# Altium PCB PCB2.PcbDoc
Units mm, origin at the board's own origin, x right, y up, seen from the top; angles counter-clockwise.
Board outline 70.6 x 47 mm, 2 copper layers (Top Layer, Bottom Layer); 29 components, 22 nets, 107 pads, 16 vias.
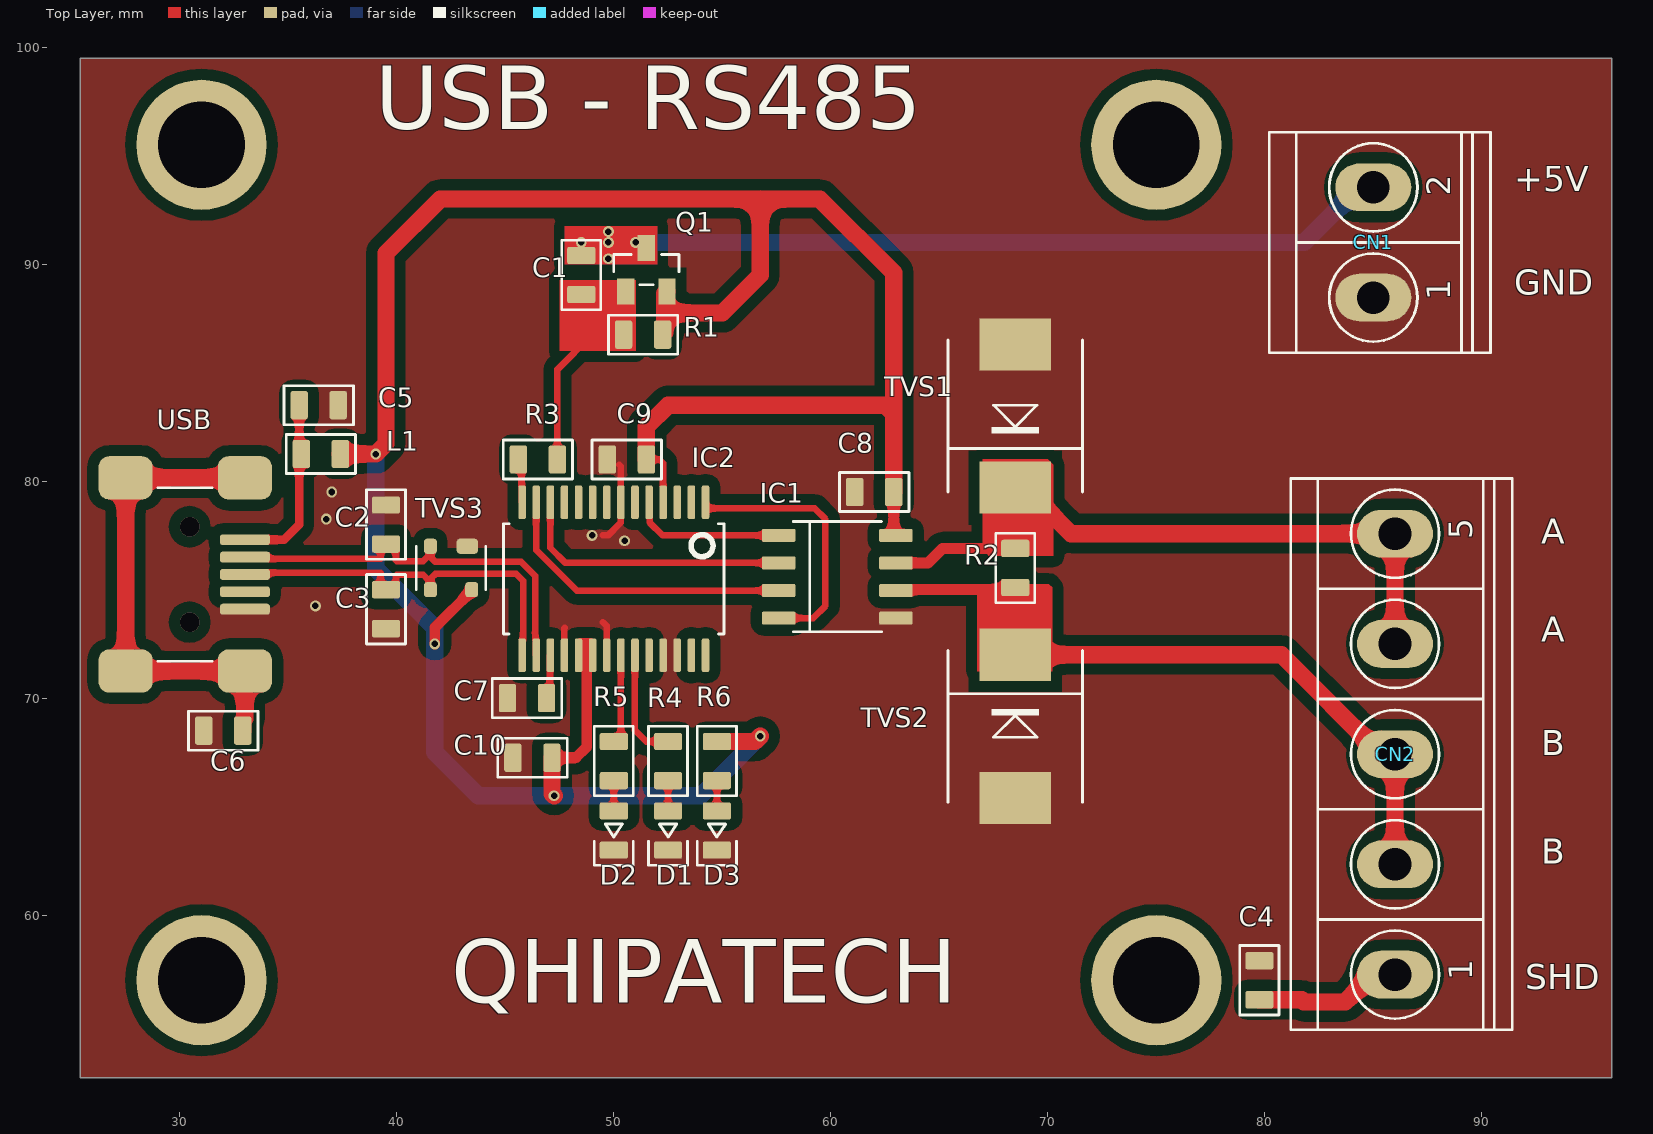
[diagram p0: Top Layer view]
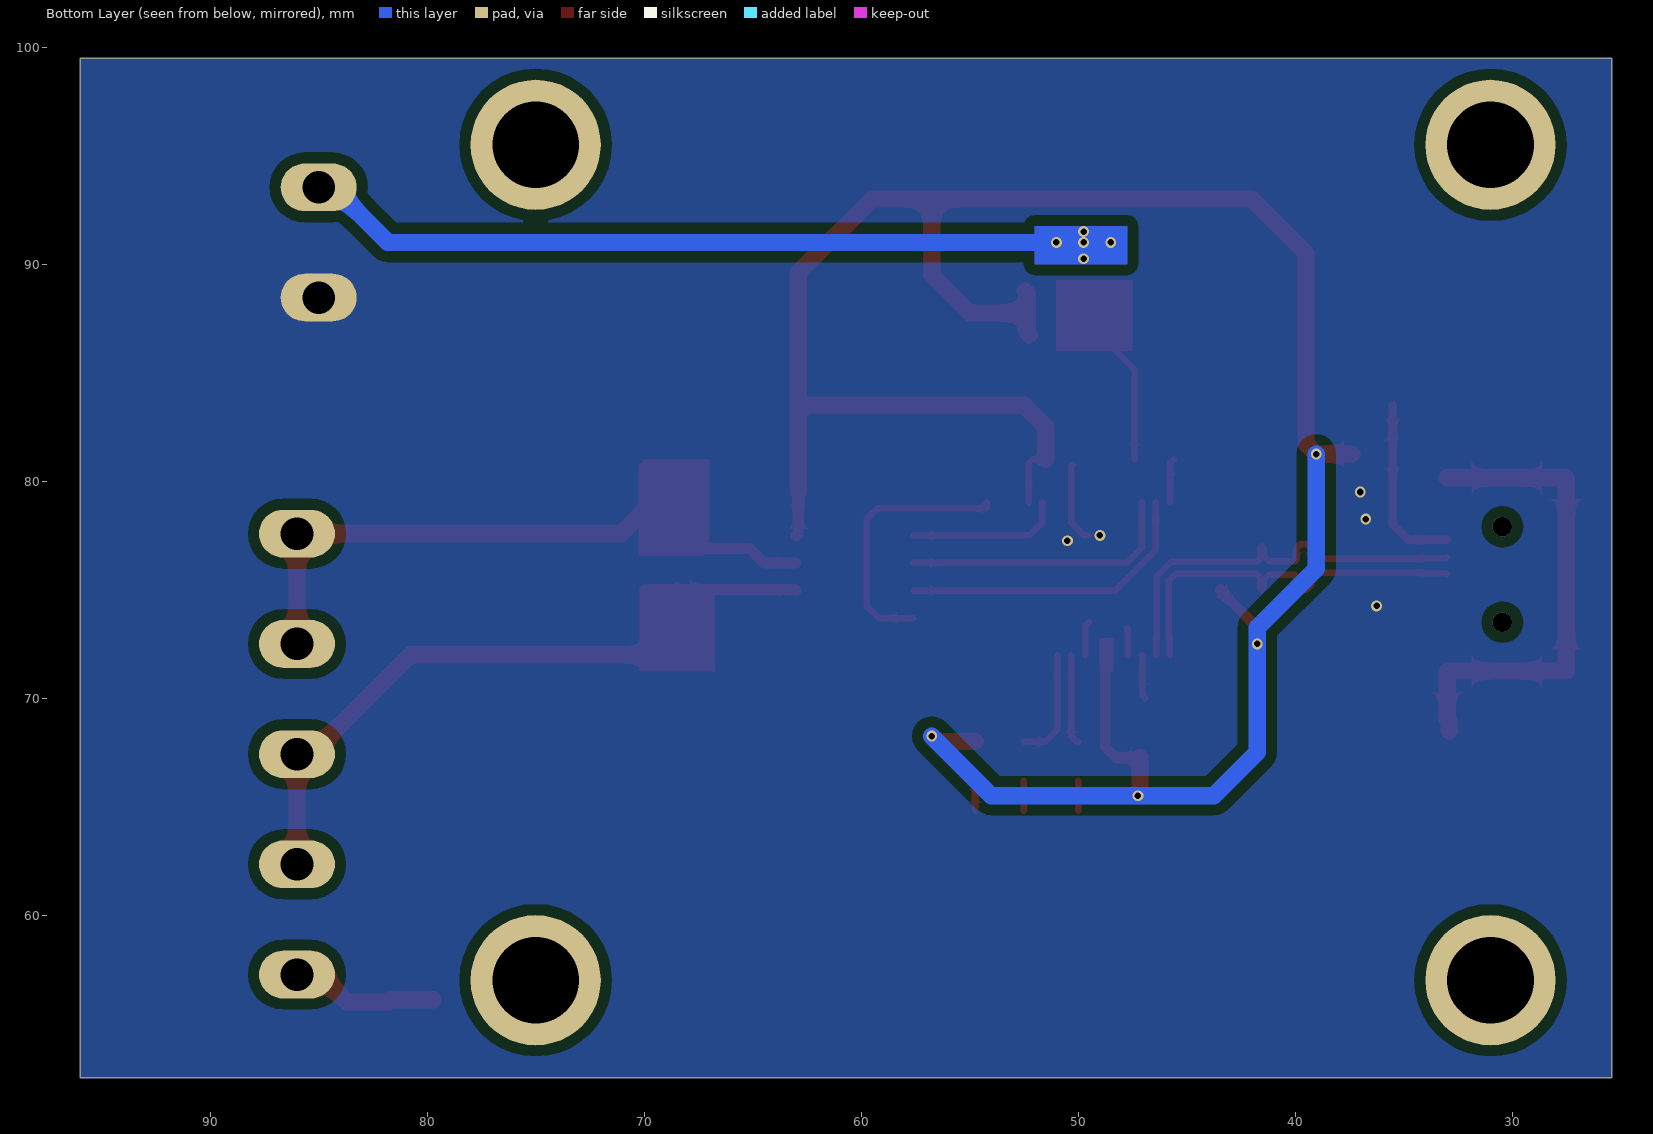
[diagram p1: Bottom Layer view, seen from below]
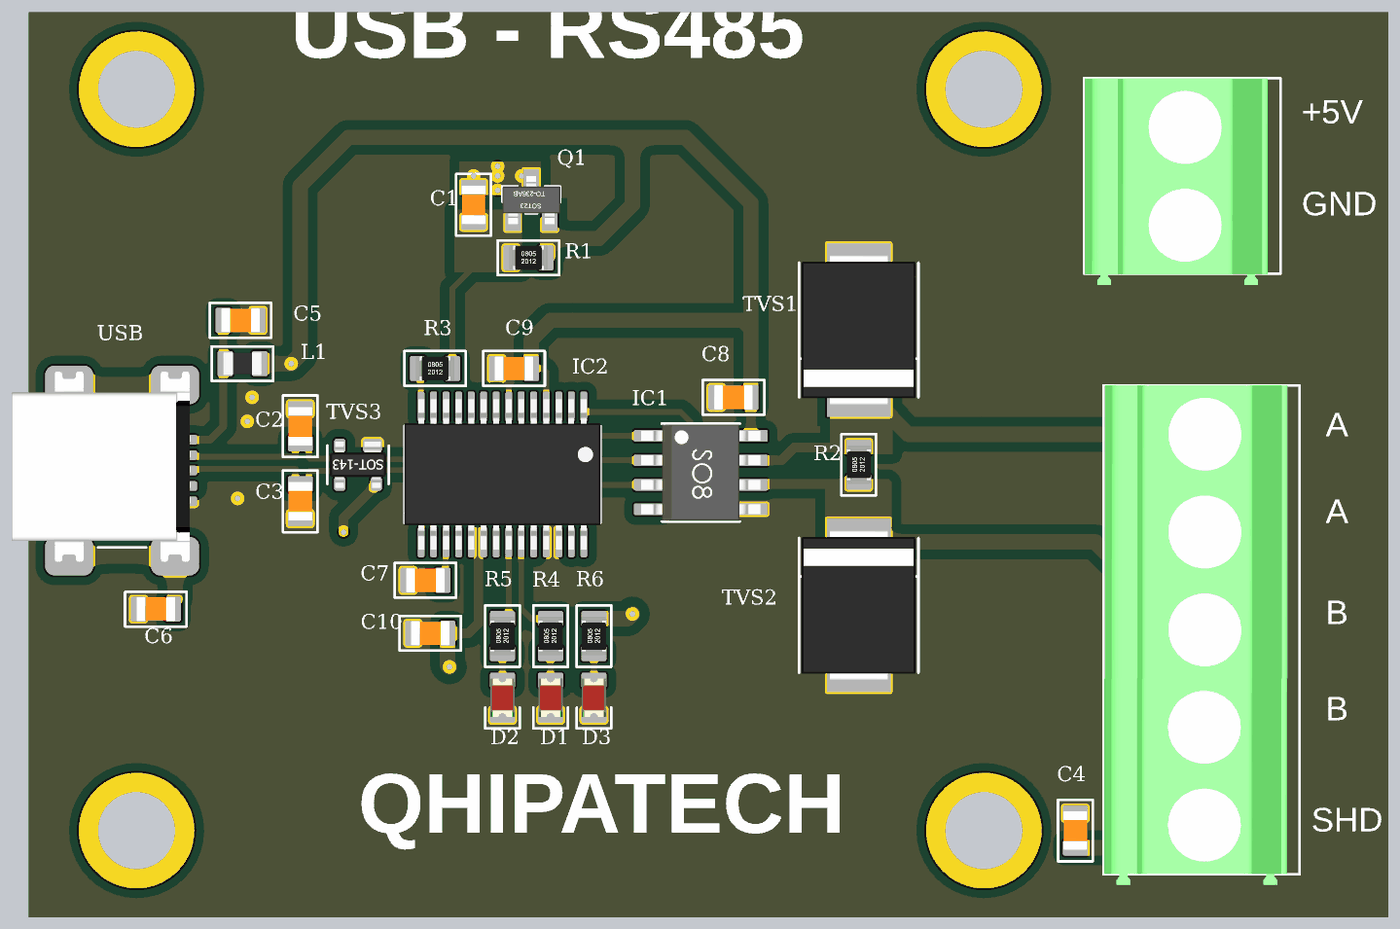
[diagram p2: 3D render of the assembled board from above, using the file's embedded part models]

## Layer stack, top to bottom
Top Solder: solder mask 0.0102, Solder Resist, Dk 3.5
Top Layer: signal copper 0.0356
Dielectric 1: dielectric 0.32, FR-4, Dk 4.8
Bottom Layer: signal copper 0.0356
Bottom Solder: solder mask 0.0102, Solder Resist, Dk 3.5

## Board outline
25.4,52.5 25.4,99.5 96,99.5 96,52.5

## Design rules (kind name [scope] priority, off if disabled: settings)
Clearance [All] p1: gap=0.2 ignorepadtopadclearanceinfootprint=FALSE except(0.5: Arc-Fill Arc-Poly Arc-Region Track-Fill Track-Poly Track-Region SMDPad-Fill SMDPad-Poly SMDPad-Region THPad-Fill THPad-Poly THPad-Region Via-Fill Via-Poly Via-Region Fill-Fill Fill-Poly Fill-Region Poly-Poly Poly-Region Region-Region)
DiffPairsRouting [All] p1: maxlimit=0.254 minlimit=0.2 mostfreqgap=0.254 toplayer_minwidth=0.3 toplayer_maxwidth=0.3 toplayer_prefwidth=0.3 bottomlayer_minwidth=0.3 bottomlayer_maxwidth=0.3 bottomlayer_prefwidth=0.3 maxuncoupledlength=12.7
PlaneConnect [All] p1: planeconnectstyle=Direct reliefexpansion=0.508 reliefentries=4 reliefconductorwidth=0.254 reliefairgap=0.254
PolygonConnect [All] p1: connectstyle=Direct reliefconductorwidth=0.254 reliefentries=4 polygonreliefangle="90 Angle" airgapwidth=0.254
RoutingVias [All] p1: holewidth=0.711 width=1.27 viastyle="Through Hole" minholewidth=0.711 minwidth=1.27 maxholewidth=0.711 maxwidth=1.27
SolderMaskExpansion [All] p1: expansion=0.102 istentingtop=FALSE
Width [All] p1: maxlimit=0.8 minlimit=0.3 preferedwidth=0.5
28 further rules are at their usual default settings.

## Classes and differential pairs
differential pair USB: +D+ -D-

## Components (designator, comment, footprint, x,y, rotation, side; value= is the part's Value field where it differs from the comment)
C1 "100nF" C0805 48.5,89.5 r90 top
C2 "47uF" C0805 39.5,78 r270 top value=100nF
C3 "47uF" C0805 39.5,74.1 r90 top value=100nF
C4 "100nF" C0805 79.75,57 r270 top
C5 "100nF" C0805 36.4,83.5 r180 top
C6 "100nF" C0805 32,68.5 r0 top
C7 "100nF" C0805 46,70 r0 top
C8 "100nF" C0805 62,79.5 r0 top
C9 "47uF" C0805 50.6,81 r0 top value=100nF
C10 "100nf" C0805 46.25,67.25 r0 top value=100nF
CN1 "TB508-02" TB508-02 85,91 r90 top
CN2 "TB-05" TB508-05 86,67.42 r90 top
D1 "LED" LED-0805 52.5,63.9 r90 top
D2 "LED" LED-0805 50,63.9 r90 top
D3 "LED" LED-0805 54.75,63.9 r90 top
IC1 "MAX485" SOIC8-N 60.3,75.595 r0 top
IC2 "FT232RL" SSOP-28 50,75.5 r270 top
L1 "10uH" L0805 36.5,81.25 r0 top
Q1 "IRLML6402TRPBF" SOT23-3 51.5,89.75 r0 top
R1 "100k0" R0805 51.35,86.75 r0 top value=1k0
R2 "120" R0805 68.5,76 r90 top value=1k0
R3 "2K0" R0805 46.5,81 r0 top value=1k0
R4 "1k0" R0805 52.5,67.1 r90 top
R5 "1k0" R0805 50,67.1 r90 top
R6 "1k0" R0805 54.75,67.1 r90 top
TVS1 "SMDJ15A" SMC 68.5,83 r90 top
TVS2 "SMDJ15A" SMC 68.5,68.7 r270 top
TVS3 "PRTR5V0U2X,215" SOT143-4 42.5,76 r180 top
USB "690-005-299-043" USB-Mini 33,75.7 r270 top (schematic designator J1)

## Footprints (in the part's own frame and the unit in brackets; to place one, negate y for a bottom-side part, rotate by r counter-clockwise, add the part's x,y. Pads: shape width x height; smd on the part's side, far side on the other; paste and mask are expansions set on the pad)
C0805 [mm] "Ceramic capacitor 0805"
  rrect25% 0.8x1.3 smd: 1(-0.9,0) 2(0.9,0)
  silkscreen extent -1.6,-0.9 1.6,0.9, body extent -1,-0.62 1,0.63, height 0.8
L0805 [mm] "SMT INDUCTOR 0805"
  rrect25% 0.8x1.3 smd: 1(-0.9,0) 2(0.9,0)
  silkscreen extent -1.6,-0.9 1.6,0.9, body extent -1,-0.6 1,0.6, height 0.95
LED-0805 [mm] "SMT LED DIODE 0805"
  rrect25% 0.8x1.3 smd: 1(-0.9,0) 2(0.9,0)
  silkscreen extent -1.6,-0.9 1.6,0.9, body extent -1.01,-0.62 1.01,0.63, height 1.1
R0805 [mm] "SMD RESISTOR 0805"
  rrect25% 0.8x1.3 smd: 1(-0.9,0) 2(0.9,0)
  silkscreen extent -1.6,-0.9 1.6,0.9, body extent -1,-0.62 1,0.63, height 0.45
SMC [mm] "SMB, DO-214AB -  Package"
  rect 2.4x3.3 smd: 1(-3.3,0) 2(3.3,0)
  silkscreen extent -3.5,-3.1 3.5,3.1, body extent -3.9,-2.95 3.9,2.95, height 2.4
SOIC8-N [mm] "SOIC8 - SO08 - SMALL OUTLINE INTEGRATED CIRCUIT"
  rrect25% 1.55x0.6 smd: 1(-2.7,1.905) 2(-2.7,0.635) 3(-2.7,-0.635) 4(-2.7,-1.905) 5(2.7,-1.905) 6(2.7,-0.635) 7(2.7,0.635) 8(2.7,1.905)
  silkscreen extent -2.03,-2.54 2.03,2.54, body extent -3.1,-2.5 3.1,2.5, height 1.75
SOT23-3 [mm] "SOT23-3 Package"
  rect 0.8x1.2 smd: 1(-0.95,-1) 2(0.95,-1) 3(0,1)
  silkscreen extent -1.5,-0.7 1.5,0.7, body extent -1.5,-1.25 1.5,1.25, height 1.09
SOT143-4 [mm] "SOT143-4 Package, TO-253-4, TO-253AA Case"
  rrect50% 1x0.7 smd: 1(-0.75,-1)
  rrect50% 0.6x0.7 smd: 2(0.95,-1) 3(0.95,1) 4(-0.95,1)
  silkscreen extent -1.6,-1 1.6,1, body extent -1.46,-1.21 1.46,1.21, height 1
SSOP-28 [mm] "SSOP-28  / SSOP28"
  rrect50% 1.55x0.35 smd: 1(-3.525,4.225) 2(-3.525,3.575) 3(-3.525,2.925) 4(-3.525,2.275) 5(-3.525,1.625) 6(-3.525,0.975) 7(-3.525,0.325) 8(-3.525,-0.325) 9(-3.525,-0.975) 10(-3.525,-1.625) 11(-3.525,-2.275) 12(-3.525,-2.925) 13(-3.525,-3.575) 14(-3.525,-4.225) 15(3.525,-4.225) 16(3.525,-3.575) 17(3.525,-2.925) 18(3.525,-2.275) 19(3.525,-1.625) 20(3.525,-0.975) 21(3.525,-0.325) 22(3.525,0.325) 23(3.525,0.975) 24(3.525,1.625) 25(3.525,2.275) 26(3.525,2.925) 27(3.525,3.575) 28(3.525,4.225)
  silkscreen extent -2.54,-5.08 2.54,5.08, body extent -3.9,-5.1 3.9,5.1, height 1.9
TB508-02 [mm] "Vertical terminal block 0.2 inch (5.08mm) pitch"
  oval 2.2x3.5 hole 1.5: 1(-2.54,0) 2(2.54,0)
  silkscreen extent -5.08,-5.4 5.08,4.8, body extent -5.67,-4.75 5.06,4.75, height 15
TB508-05 [mm] "Vertical terminal block 0.2 inch (5.08mm) pitch"
  oval 2.2x3.5 hole 1.5: 1(-10.16,0) 2(-5.08,0) 3(0,0) 4(5.08,0) 5(10.16,0)
  silkscreen extent -12.7,-5.4 12.7,4.8, body extent -13.24,-4.78 12.71,4.75, height 15.12
USB-Mini [mm] "CONN RCPT USB2.0 MINI B SMD R/A"
  rrect50% 0.5x2.3 smd: 1(-1.6,0) 2(-0.8,0) 3(0,0) 4(0.8,0) 5(1.6,0)
  rrect50% 2x2.5 smd: SHD(-4.45,0) SHD(-4.45,-5.5) SHD(4.45,0) SHD(4.45,-5.5)
  silkscreen extent -4,-4 4,-1.5, body extent -5.15,-8.45 4.75,0.8, height 3.93

## Part data
C1 C2 C3 C4 C5 C6 C7 C8 C9 C10: library part Capacitor, "Capacitor without polarity", Voltage=25V
CN1: library part TB-02, "Terminal Block"
CN2: "Terminal Block"
D1 D2 D3: "LED - Light-Emitting Diode"
IC1: "IC TRANSCEIVER HALF 1/1 8SOIC"
IC2: library part FT232, "USB Bridge, USB to UART USB 2.0 UART Interface 28-SSOP"
L1: library part Inductor, "Inductor for low power", Max. current=0.5A, Core type=Ferrite, Unit price=0.1
Q1: library part MOSFET-P-LP, "P-Channel 20V 3.7A (Ta) 1.3W (Ta) /SOT-23 - LowPower"
R1 R2 R3 R4 R5 R6: library part Resistor, "Single resistor", Power=0.125W, Unit price=0.1
TVS1 TVS2: library part TVS-SINGLE, "TVS DIODE - Transient Voltage Suppression Diode"
TVS3: library part TVS-DUAL-SOT143B, "Clamp  Ipp Tvs Diode Surface Mount SOT-143B"
USB: library part USB-Mini-B, "CONN RCPT USB2.0 MINI B SMD R/A"

## Free pads (board coordinates)
  round 6 hole 4: 3(31,57) 3(31,95.5) 3(75,57) 3(75,95.5)

## Via types
v1: diameter 0.5, hole 0.3, Top Layer to Bottom Layer, 14 vias
v2: diameter 0.9, hole 0.9, Top Layer to Bottom Layer, 2 vias

## Nets (pads, with @x,y where several pads share a name; then routed paths per layer and width w, separated by ;. In a path a pad name is that pad's centre, name@x,y a point inside that pad or via, vN(x,y) a via of type N, cw(c..) or ccw(c..) an arc to the next point about the centre after c; other vN are vias at no path point)
D+: C3.2 IC2.15 TVS3.3 USB.3 | length 18.7
  Top Layer w0.3: USB.3 33.059,75.759 34.078,75.759 34.102,75.783 39.25,75.783 39.25,75.21 39.46,75 C3.2 39.75,75 39.96,75.21 39.96,75.642 40,75.683 41.217,75.683 41.44,75.459 41.44,75.109 TVS3.3 41.601,75.051 41.601,75.547 41.777,75.723 45.5,75.723 45.823,75.4 45.823,72.673 45.8,72.65 45.8,72 IC2.15
D-: C2.2 IC2.16 TVS3.2 USB.2 | length 19.6
  Top Layer w0.3: USB.2 33.059,76.44 34.078,76.44 34.101,76.418 39.25,76.418 39.25,76.89 39.46,77.1 C2.2 39.75,77.1 39.96,76.89 39.96,76.358 40,76.318 41.217,76.318 41.44,76.541 41.44,76.891 TVS3.2 41.601,76.949 41.601,76.453 41.777,76.277 45.729,76.277 46.377,75.629 46.377,72.673 46.4,72.65 46.4,72 IC2.16
GND: C2.1 C3.1 C4.1 C5.1 C6.1 C7.1 C8.1 C9.1 C10.1 CN1.1 D1.1 D2.1 D3.1 IC1.5 IC2.7 IC2.18 IC2.21 IC2.25 IC2.26 TVS1.2 TVS2.2 TVS3.1 USB.5 | length 6.6
  Top Layer w0.3: IC2.18 47.725,73.225 47.75,73.25 ; 49.5,73.5 49.675,73.325 IC2.21 ; 49.5,77.5 49.735,77.5 50.325,78.09 IC2.7 50.325,80.675 50.25,80.75
  other v1: 36.25,74.25 50.5,77.25 49,77.5 36.75,78.25 37,79.5
NetC1_1: C1.1 Q1.1 R1.1 R3.2 | length 6.4
  Top Layer w0.3: R3.2 47.4,85.15 49,86.75
NetC1_2: C1.2 CN1.2 Q1.3 | length 36.3
  Top Layer w0.3: Q1.3@51.25,90.4 51.5,90.65 Q1.3
  Bottom Layer w0.8: 50.25,91 v1(51,91) 81.81,91 84.35,93.54 CN1.2
  other v1: 49.75,90.25 48.5,91 49.75,91 49.75,91.5
NetC4_2: C4.2 CN2.1 | length 6.8
  Top Layer w0.8: C4.2 81.7,56.1 81.8,56 83.711,56 84.971,57.26 CN2.1
NetC5_2: C5.2 L1.1 USB.1 | length 8.3
  Top Layer w0.4: USB.1 34.8,77.3 35.5,78 C5.2
NetC6_2: C6.2 USB.SHD | length 22.7
  Top Layer w0.8: C6.2 32.9,68.95 33,69.05 33,71.25 27.5,71.25 27.5,80.15 USB.SHD@33,80.15
NetC7_2: C7.2 IC2.17 | length 2
  Top Layer w0.3: C7.2 47.05,70.15 47.05,71.95 IC2.17
NetCN2_2: CN2.2 CN2.3 IC1.6 R2.1 TVS2.1 | length 30
  Top Layer w0.5: IC1.6 63.05,75.01 68.41,75.01 R2.1
  Top Layer w0.8: TVS2.1 80.77,72 85.35,67.42 CN2.3 CN2.2
NetCN2_4: CN2.4 CN2.5 IC1.7 R2.2 TVS1.1 | length 29.2
  Top Layer w0.5: IC1.7 64.48,76.23 65.15,76.9 R2.2
  Top Layer w0.8: TVS1.1 68.95,79.7 71.07,77.58 CN2.5 CN2.4
NetD1_2: D1.2 R4.1 | length 1.4
  Top Layer w0.3: D1.2 R4.1
NetD2_2: D2.2 R5.1 | length 1.4
  Top Layer w0.3: D2.2 R5.1
NetD3_2: D3.2 R6.1 | length 1.4
  Top Layer w0.3: D3.2 R6.1
NetIC1_1: IC1.1 IC2.5 | length 7.1
  Top Layer w0.3: IC2.5 51.65,79 51.65,78.1 52.25,77.5 IC1.1
NetIC1_2: IC1.2 IC2.12 | length 12.9
  Top Layer w0.3: IC2.12 47.075,76.925 47.77,76.23 IC1.2
NetIC1_3: IC1.3 IC2.13 | length 14.1
  Top Layer w0.3: IC2.13 46.425,76.825 48.29,74.96 IC1.3
NetIC1_4: IC1.4 IC2.1 | length 12.4
  Top Layer w0.3: IC2.1 54.225,78.775 54.25,78.75 59.25,78.75 59.75,78.25 59.75,74.25 59.19,73.69 IC1.4
NetIC2_14: IC2.14 R3.1 | length 2
  Top Layer w0.3: R3.1 45.75,80.85 45.75,79.05 IC2.14
NetIC2_22: IC2.22 R5.2 | length 4.2
  Top Layer w0.3: R5.2 50.075,68 50.325,68.25 IC2.22
NetIC2_23: IC2.23 R4.2 | length 5.2
  Top Layer w0.3: IC2.23 50.975,68.525 51.5,68 R4.2
VCC: C8.2 C9.2 C10.2 IC1.8 IC2.4 IC2.19 IC2.20 L1.2 Q1.2 R1.2 R6.2 TVS3.4 | length 121.1
  Top Layer w0.3: C9.2 52.099,81 52.275,80.824 IC2.4
  Top Layer w0.5: v1(41.75,72.5) 41.75,73.25 43.45,74.95 TVS3.4 ; C10.2 48.25,67.25 48.75,67.75 48.75,72.25 ; C8.2 62.9,77.55 62.95,77.5 IC1.8
  Top Layer w0.8: L1.2 v1(39.031,81.25) 39.5,81.719 39.5,90.5 42,93 56.75,93 ; C10.2 47.15,65.6 v1(47.25,65.5) ; C9.2 51.5,82.5 52.5,83.5 62.5,83.5 62.75,83.25 62.9,83.25 ; R1.2 52.35,86.85 52.35,87.75 ; Q1.2 52.35,88.65 52.35,87.75 ; R6.2 56.5,68 v1(56.75,68.25) ; C8.2 62.9,83.25 ; 52.35,87.75 55,87.75 56.75,89.5 56.75,93 ; 56.75,93 59.5,93 62.9,89.6 62.9,83.25
  Bottom Layer w0.8: v1(39.031,81.25) 39.031,75.969 41.75,73.25 v1(41.75,72.5) 41.75,67.5 43.75,65.5 v1(47.25,65.5) 54,65.5 v1(56.75,68.25)
pads on no net: IC2.2 IC2.3 IC2.6 IC2.8 IC2.9 IC2.10 IC2.11 IC2.24 IC2.27 IC2.28 USB.4
copper on no net:
  other v2: 30.45,73.5 30.45,77.9

## Polygon pours and split planes (outlines as drawn)
GND on Top Layer "GND_L01_P000" (solid, pour order 0): 25.4,52.5 25.4,99.5 96,99.5 96,52.5
GND on Bottom Layer "GND_L02_P001" (solid, pour order 1): 25.4,52.5 25.4,99.5 96,99.5 96,52.5

## Other copper
Top Layer:
  region net NetCN2_2: 66.75,75.25 70.05,75.25 70.2,75.1 70.2,71.25 66.75,71.25
  region net NetCN2_4: 67.25,76.551 67,77.075 67,81 70,81 70.25,80.75 70.25,76.551
  region net NetC1_2: 52,90 52,91.75 47.75,91.75 47.75,90
  region net VCC: 48.375,72.75 49,72.75 49,71.25 48.375,71.25
  region net NetC1_1: 47.5,89.25 51,89.25 51,86 47.5,86
Bottom Layer:
  region net NetC1_2: 52,91.75 52,90 47.75,90 47.75,91.75

## Silkscreen, mask and mechanical layers (free items; w line width, h text height)
Top Overlay:
  text "USB - RS485" at 39,95.239 h5
  text "+5V" at 91.5,92.968 h2
  text "GND" at 91.5,88.197 h2
  text "A" at 92.75,76.718 h2
  text "A" at 92.75,72.218 h2
  text "B" at 92.75,66.968 h2
  text "B" at 92.75,61.968 h2
  text "SHD" at 92,56.197 h2
  text "QHIPATECH" at 42.5,54.989 h5
Mechanical 1:
  the board outline again, w1.2

## Text inside footprints (layer, text, board x,y; h text height)
CN1: Top Overlay "1" at 88.556,88.333 h1.1 r90; Top Overlay "2" at 88.556,93.159 h1.1 r90
CN2: Top Overlay "1" at 89.556,57.006 h1.1 r90; Top Overlay "5" at 89.556,77.326 h1.1 r90